# Allegro board HY_IP6518_TEST_V10A.brd
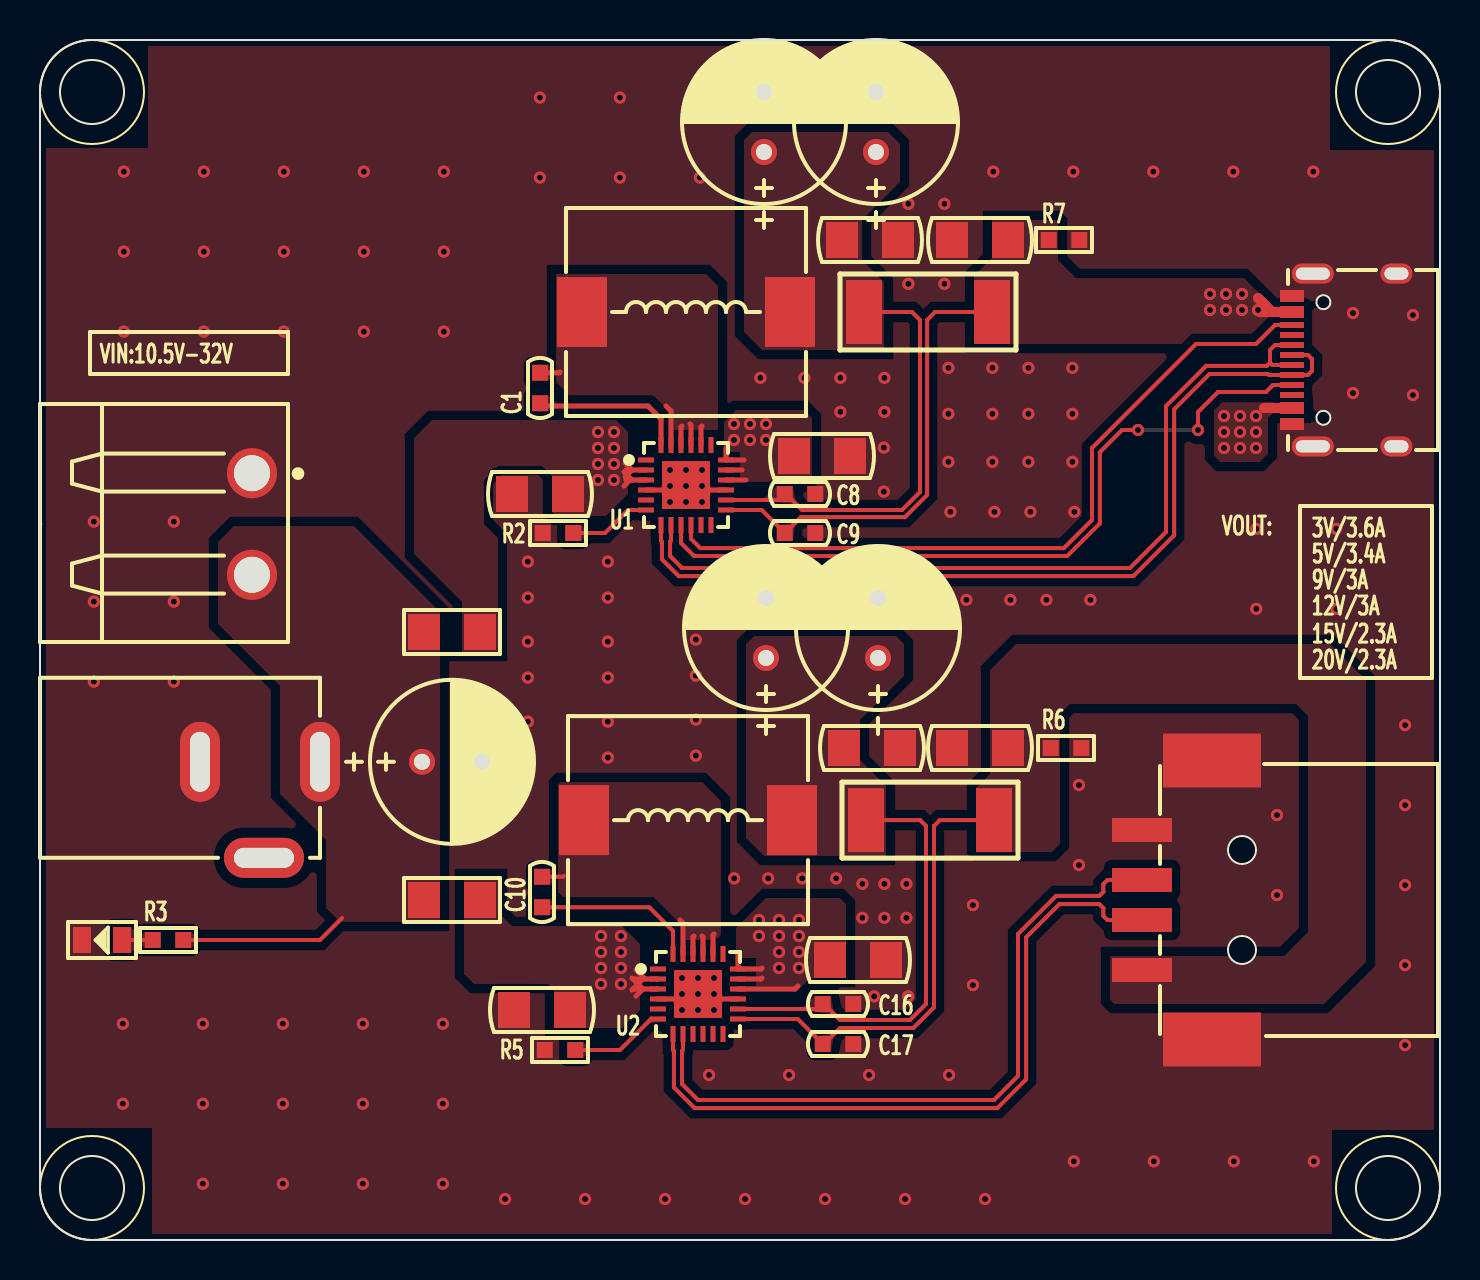
[diagram p0: board, top side]
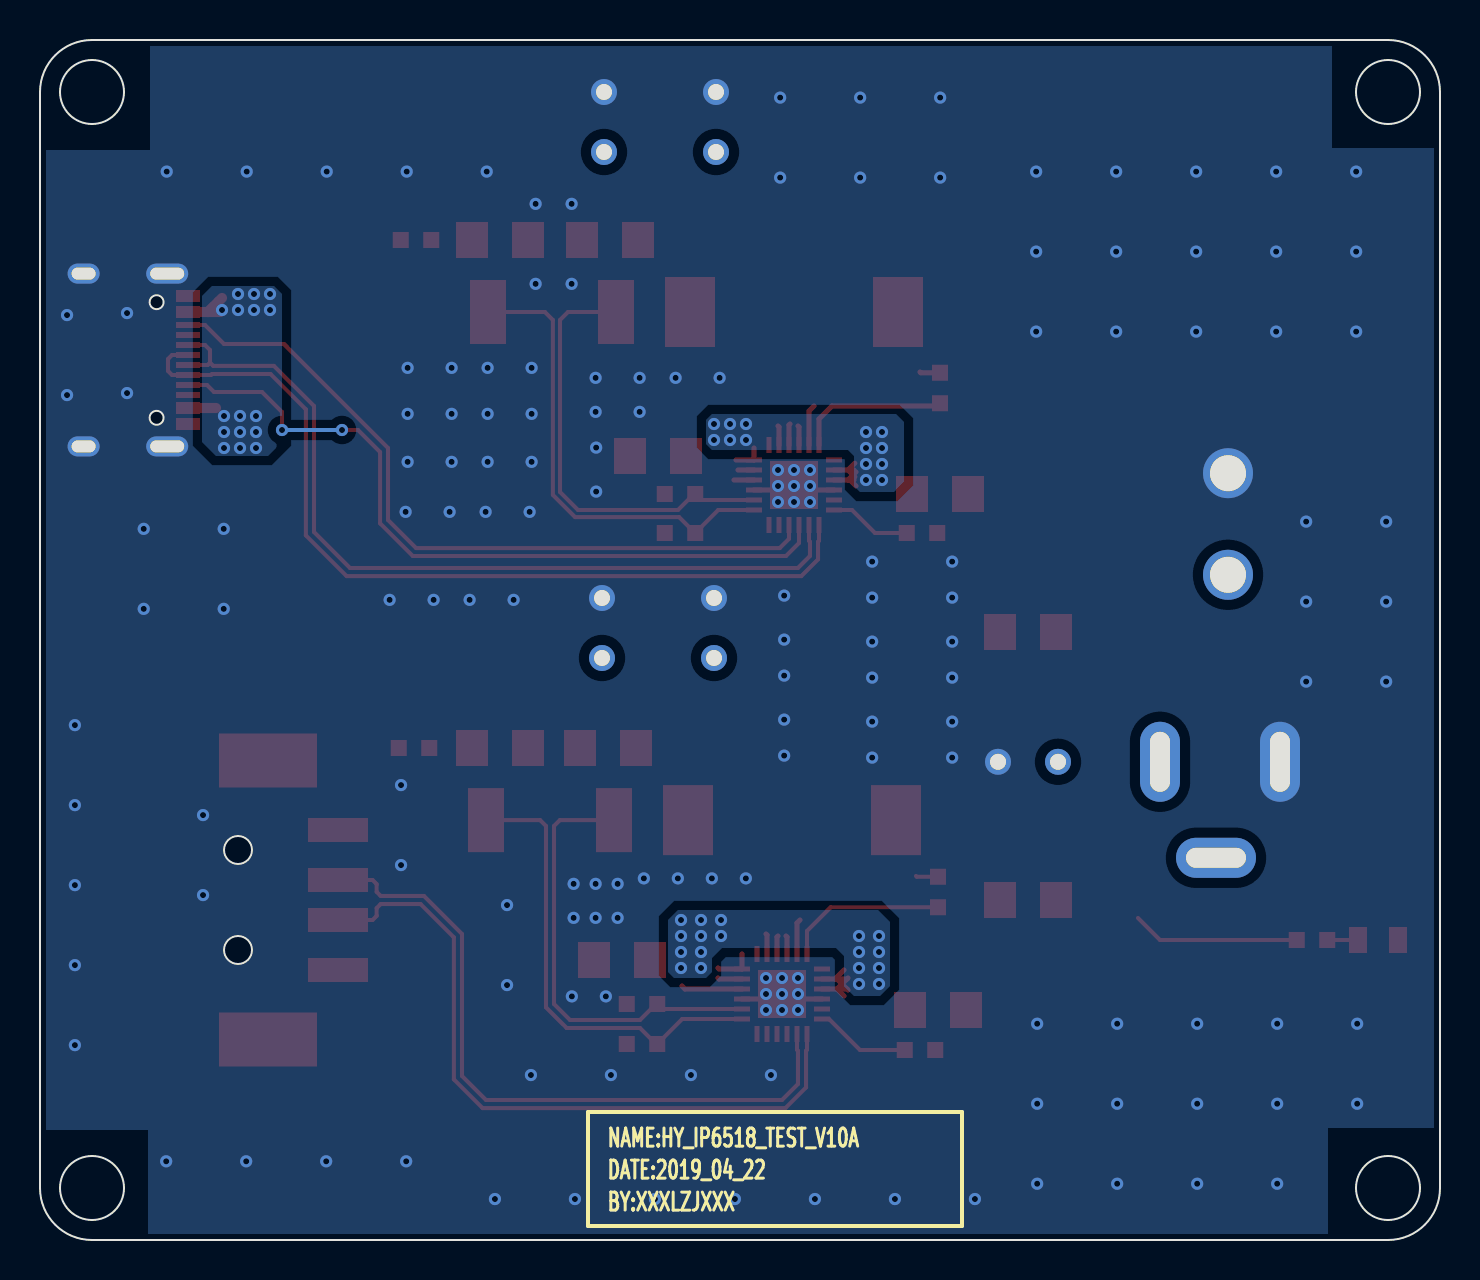
[diagram p1: board, bottom side, seen from below]

Outline 70 x 60 mm; copper layers: TOP, BOTTOM. Coordinates in mm from the lower left corner of the outline.
Outline path: circle c2.6,57.4 r1.6 ; circle c2.6,2.6 r1.6 ; circle c67.4,57.4 r1.6 ; circle c67.4,2.6 r1.6 ; 0,57.4 arc(0.76,59.24) 2.6,60 67.4,60 arc(69.24,59.24) 70,57.4 70,2.6 arc(69.24,0.76) 67.4,0 2.6,0 arc(0.76,0.76) 0,2.6 0,57.4

## Design rules (mm)
constraint set DEFAULT: min track width 0.203, pair gap 0.203
net group DP1: nets USB1_DM USB1_DP
net group DP2: nets USB2_DM USB2_DP

## Placement (name value [footprint] x y rotation side)
C1  0.1uF_50V  [C0603]  25 42.6 270 top
C2  100uF_50V  [CAP-3R0-8X12]  36.2 55.9 90 top
C3  10uF_50V  [C1206]  41.5 50 0 top
C4  10uF_50V  [C1206]  47 50 180 top
C5  10uF_50V  [C1206]  25 37.3 0 top
C6  10uF_50V  [C1206]  39.1 39.2 180 top
C7  100uF_50V  [CAP-3R0-8X12]  20.6 23.91 0 top
C8  0.1uF_50V  [C0603]  38 37.3 0 top
C9  0.1uF_50V  [C0603]  38 35.35 0 top
C10  0.1uF_50V  [C0603]  25.1 17.4 270 top
C11  100uF_50V  [CAP-3R0-8X12]  36.3 30.6 90 top
C12  10uF_50V  [C1206]  41.6 24.6 0 top
C13  10uF_50V  [C1206]  47 24.6 180 top
C14  10uF_50V  [C1206]  25.1 11.5 0 top
C15  10uF_50V  [C1206]  40.9 14 180 top
C16  0.1uF_50V  [C0603]  39.9 11.8 0 top
C17  0.1uF_50V  [C0603]  39.9 9.8 0 top
C18  100uF_50V  [CAP-3R0-8X12]  41.8 55.9 90 top
C19  100uF_50V  [CAP-3R0-8X12]  41.9 30.6 90 top
D1  LED_GREEN  [LED0805]  3.1 15 180 top
DC1  -  [DC005]  8 23.91 0 top
F1  0469005.WR  [FUSE1206]  20.6 17 0 top
F2  0469005.WR  [FUSE1206]  20.6 30.4 0 top
J1  -  [WJ2EDGRC-5R08-2P]  10.6 35.8 270 top
L1  SMMS1040-220M  [L10040]  32.3 46.4 0 top
L2  SMMS1040-220M  [L10040]  32.4 20.99 0 top
NOREF  -  []  0 0 90 top
NOREF#2  -  []  68.07 58.85 0 top
NOREF#3  -  []  0 0 0 top
R1  0R02  [R2512]  44.4 46.4 180 top
R2  47K  [R0603]  25.9 35.35 180 top
R3  10K  [R0603]  6.4 15 180 top
R4  0R02  [R2512]  44.5 20.99 180 top
R5  47K  [R0603]  26 9.5 180 top
R6  3.3K  [R0603]  51.3 24.6 0 top
R7  3.3K  [R0603]  51.2 50 0 top
U1  IP6518C  [QFN24-4X4X0R5-2R4X2R4]  32.3 37.75 270 top
U2  IP6518C  [QFN24-4X4X0R5-2R4X2R4]  32.9 12.3 270 top
USB1  -  [TYPE-C-31-M-12]  62.6 44 90 top
USB2  USB-A  [USB-A-SMD]  56 17 0 top

## Library data of the parts
C1 C8-C10 C16 C17 = CAP NP_2
C2 C7 C11 C18 C19 = CAPT_100UF_3528_6r3V_10%_LXXXX
C3-C6 C12-C15 = CAP NP_3
D1 = LED_2
DC1 = DC005
F1 F2 = FUSE
J1 = CONN RCPT 2
L1 L2 = IND_BEAD_0805_600OHM_1
R1-R7 = R_Generic
U1 U2 = IP6518C_0
USB1 = TYPE-C_16P
USB2 = USB-A

## Footprints (pads in the part's own frame, mm; a bottom-side part is the same pattern mirrored in y, then rotated)
C0603
  rect 0.8x0.8 smd: 1(-0.762,0) 2(0.762,0)
C1206
  rect 1.6x1.8 smd: 1(-1.4,0) 2(1.4,0)
CAP-3R0-8X12
  round 1.3 hole 0.8: 1(-1.5,0) 2(1.5,0)
DC005
  oval 2x4 hole 1x3: 1(6,0) 2(0,0)
  oval 4x2 hole 3x1: 3(3.2,-4.8)
FUSE1206
  rect 1.6x1.8 smd: 1(-1.4,0) 2(1.4,0)
L10040
  rect 2.5x3.5 smd: 1(-5.2,0) 2(5.2,0)
LED0805
  rect 0.9x1.3 smd: 1(-1,0) 2(1,0)
QFN24-4X4X0R5-2R4X2R4
  rect 0.25x0.8 smd: 1(-1.25,-2) 2(-0.75,-2) 3(-0.25,-2) 4(0.25,-2) 5(0.75,-2) 6(1.25,-2) 13(1.25,2) 14(0.75,2) 15(0.25,2) 16(-0.25,2) 17(-0.75,2) 18(-1.25,2)
  rect 0.8x0.25 smd: 7(2,-1.25) 8(2,-0.75) 9(2,-0.25) 10(2,0.25) 11(2,0.75) 12(2,1.25) 19(-2,1.25) 20(-2,0.75) 21(-2,0.25) 22(-2,-0.25) 23(-2,-0.75) 24(-2,-1.25)
  rect 2.4x2.4 smd: 25(0,0)
R0603
  rect 0.8x0.8 smd: 1(-0.762,0) 2(0.762,0)
R2512
  rect 1.8x3.2 smd: 1(-3.2,0) 2(3.2,0)
TYPE-C-31-M-12
  rect 0.6x1.2 smd: 1(-3.2,0) 2(-2.4,0) 11(2.4,0) 12(3.2,0)
  rect 0.3x1.2 smd: 3(-1.75,0) 4(-1.25,0) 5(-0.75,0) 6(-0.25,0) 7(0.25,0) 8(0.75,0) 9(1.25,0) 10(1.75,0)
  oval 1x2.1 hole 0.6x1.7: 13(-4.32,-1.04) 14(4.32,-1.04)
  oval 1x1.6 hole 0.6x1.2: 15(-4.32,-5.22) 16(4.32,-5.22)
USB-A-SMD
  rect 3x1.2 smd: 1(-0.9,-3.5) 2(-0.9,-1) 3(-0.9,1) 4(-0.9,3.5)
  rect 4.9x2.7 smd: 5(2.6,-6.975) 6(2.6,6.975)
WJ2EDGRC-5R08-2P
  round 2.5 hole 1.8: 1(-2.54,0) 2(2.54,0)

## Nets
GND: C2.2 C3.2 C4.2 C5.1 C6.1 C7.2 C8.2 C9.2 C11.2 C12.2 C13.2 C14.1 C15.1 C16.2 C17.2 C18.2 C19.2 D1.2(CATHODE) DC1.2 J1.1 R2.2 R5.2 R6.2 R7.2 U1.4 U1.15 U1.25 U2.4 U2.15 U2.25 USB1.1 USB1.12 USB1.13 USB1.14 USB1.15 USB1.16 USB2.4 USB2.5 USB2.6
VIN: C7.1 DC1.1 F1.1 F2.1 J1.2 R3.1
VIN1: C14.2 C15.2 F1.2 U2.2 U2.3 U2.16 U2.17 U2.18
VIN2: C5.2 C6.2 F2.2 U1.2 U1.3 U1.16 U1.17 U1.18
USB1_DM: U2.7 USB2.2
USB1_DP: U2.8 USB2.3
USB2_CC1: U1.9 USB1.4
USB2_CC2: U1.10 USB1.10
USB2_DM: U1.7 USB1.5 USB1.7
USB2_DP: U1.8 USB1.6 USB1.8
VOUT1: C13.1 C17.1 R4.1 R6.1 U2.13 USB2.1(VBUS)
VOUT2: C4.1 C9.1 R1.1 R7.1 U1.13 USB1.2 USB1.11(VBUS2)
N17443074: R5.1 U2.6
N17443738: C10.2 U2.24
N17443748: C10.1 L2.1 U2.20 U2.21 U2.22 U2.23
N17443922: C11.1 C12.1 C16.1 C19.1 L2.2(B) R4.2 U2.14(VSP)
N17447851: D1.1 R3.2
N17449043: C1.2 U1.24
N17449047: C1.1 L1.1 U1.20 U1.21 U1.22 U1.23
N17449053: C2.1 C3.1 C8.1 C18.1 L1.2(B) R1.2 U1.14(VSP)
N17449268: R2.1 U1.6

Pads without a net: DC1 3; U1 1 5 11 12 19; U2 1 5 9 10 11 12 19; USB1 3 9

## Via types
v1: diameter 0.61, hole 0.305, TOP to BOTTOM, 209 vias

## Routing (per net, layer and track width the routed paths; a pad name or vN(x,y) marks a point on that pad's centre or on a via; arc(x,y) is an arc through that point)
GND: length 5.2
  TOP w0.254: v1(33.1,37.7) 33.3,37.5 U1.15 ; v1(32.1,12.3) 31.85,12.05 U2.4 ; U1.4 31.3,37.5 v1(31.5,37.7) ; U2.15 33.95,12.05 v1(33.7,12.3)
  vias: v1(2.69,35.92) v1(2.69,31.92) v1(2.69,27.92) v1(4.14,10.81) v1(4.14,6.81) v1(4.19,53.42) v1(4.19,49.42) v1(4.19,45.42) v1(6.69,35.92) v1(6.69,31.92) v1(6.69,27.92) v1(8.14,10.81) v1(8.14,6.81) v1(8.14,2.81) v1(8.19,53.42) v1(8.19,49.42) v1(8.19,45.42) v1(12.14,10.81) v1(12.14,6.81) v1(12.14,2.81) v1(12.19,53.42) v1(12.19,49.42) v1(12.19,45.42) v1(16.14,10.81) v1(16.14,6.81) v1(16.14,2.81) v1(16.19,53.42) v1(16.19,49.42) v1(16.19,45.42) v1(20.14,10.81) v1(20.14,6.81) v1(20.14,2.81) v1(20.19,53.42) v1(20.19,49.42) v1(20.19,45.42) v1(23.25,2.05) v1(24.39,33.92) v1(24.39,32.12) v1(24.39,29.92) v1(24.39,28.12) v1(24.39,25.92) v1(24.39,24.12) v1(24.99,57.12) v1(24.99,53.12) v1(27.25,2.05) v1(28.39,33.92) v1(28.39,32.12) v1(28.39,29.92) v1(28.39,28.12) v1(28.39,25.92) v1(28.39,24.12) v1(28.99,57.12) v1(28.99,53.12) v1(31.25,2.05) v1(31.5,38.5) v1(31.5,36.9) v1(32.1,13.1) v1(32.1,11.5) v1(32.3,38.5) v1(32.3,37.7) v1(32.3,36.9) v1(32.79,32.22) v1(32.79,30.02) v1(32.79,28.22) v1(32.79,26.02) v1(32.79,24.22) v1(32.9,13.1) v1(32.9,12.3) v1(32.9,11.5) v1(32.99,57.12) v1(32.99,53.12) v1(33.1,38.5) v1(33.1,36.9) v1(33.45,8.25) v1(33.7,13.1) v1(33.7,11.5) v1(34.71,18.08) v1(35.25,2.05) v1(36.02,43.11) v1(36.41,18.08) v1(37.45,8.25) v1(38.11,18.08) v1(38.22,43.11) v1(39.25,2.05) v1(39.81,18.08) v1(40.02,43.11) v1(40.02,41.41) v1(41.12,17.81) v1(41.12,16.11) v1(41.45,8.25) v1(41.71,12.18) v1(42.22,43.11) v1(42.22,41.41) v1(42.19,39.62) v1(42.19,37.42) v1(42.22,17.81) v1(42.22,16.11) v1(43.32,17.81) v1(43.32,16.11) v1(43.25,2.05) v1(43.42,51.81) v1(43.42,47.81) v1(43.41,12.18) v1(45.22,51.81) v1(45.22,47.81) v1(45.42,43.61) v1(45.42,41.31) v1(45.42,38.91) v1(45.52,36.41) v1(45.45,8.25) v1(46.32,32.01) v1(46.65,16.75) v1(46.65,12.75) v1(47.25,2.05) v1(47.62,43.61) v1(47.62,41.31) v1(47.62,38.91) v1(47.67,53.42) v1(47.72,36.41) v1(48.52,32.01) v1(49.42,43.61) v1(49.42,41.31) v1(49.42,38.91) v1(49.52,36.41) v1(50.32,32.01) v1(51.62,43.61) v1(51.62,41.31) v1(51.62,38.91) v1(51.67,53.42) v1(51.72,36.41) v1(51.69,3.93) v1(51.95,22.75) v1(51.95,18.75) v1(52.52,32.01) v1(55.67,53.42) v1(55.69,3.93) v1(59.67,53.42) v1(59.69,3.93) v1(60.81,35.56) v1(60.81,31.56) v1(61.85,21.25) v1(61.85,17.25) v1(63.67,53.42) v1(63.69,3.93) v1(64.81,35.56) v1(64.81,31.56) v1(65.65,46.35) v1(65.65,42.35) v1(68.25,25.74) v1(68.25,21.74) v1(68.25,17.74) v1(68.25,13.74) v1(68.25,9.74) v1(68.65,46.25) v1(68.65,42.25)
VIN: length 8.4
  TOP w0.203: R3.1 14,15 15.1,16.1
VIN1: length 11.4
  TOP w0.254: U2.3 30.15,12.55 ; 30.15,12.55 29.8,12.2 ; 30.15,12.55 29.65,13.05 ; 30.15,12.55 29.65,12.55 ; 37.9,12.7 37.75,12.55 U2.16 ; 36.1,13.1 36.05,13.05 U2.17 ; 36.1,13.6 36.05,13.55 U2.18 34.9,14.3 ; 30.15,13.05 29.65,12.55 ; 30.15,13.05 30.25,13.05 ; 30.15,13.05 29.65,13.05 ; 29.65,12.55 29.6,12.5 ; 30.25,13.05 29.8,13.5 ; 30.25,13.05 U2.2 ; 29.65,13.05 29.6,13.1
  vias: v1(28.05,15.2) v1(28.05,14.4) v1(28.05,13.6) v1(28.05,12.8) v1(29.05,15.2) v1(29.05,14.4) v1(29.05,13.6) v1(29.05,12.8) v1(35.95,16) v1(35.95,15.2) v1(36.95,16) v1(36.95,15.2) v1(36.95,14.4) v1(36.95,13.6) v1(37.95,16) v1(37.95,15.2) v1(37.95,14.4) v1(37.95,13.6)
VIN2: length 7.3
  TOP w0.254: 29.6,38 29.5,38 ; 29.6,38 29.2,38.4 ; 29.6,38 U1.3 ; 29.5,38 29.2,37.7 ; 29.5,38 29.3,38 ; 35.2,39 U1.18 34.3,39.6 ; 29.6,38.5 29.26,38.84 ; 29.6,38.5 29.26,38.16 ; 29.6,38.5 29.3,38.5 ; 29.6,38.5 U1.2 ; U1.17 35.1,38.5 ; U1.16 35.3,38
  vias: v1(27.9,40.4) v1(27.9,39.6) v1(27.9,38.8) v1(27.9,38) v1(28.7,40.4) v1(28.7,39.6) v1(28.7,38.8) v1(28.7,38) v1(34.7,40.8) v1(34.7,40) v1(35.5,40.8) v1(35.5,40) v1(36.3,40.8) v1(36.3,40)
USB1_DM: length 35.5
  TOP w0.203: U2.7 31.65,9.52 31.7,9.47 31.7,7.63 32.73,6.59 47.87,6.59 49.31,8.03 49.31,15.13 50.97,16.8 52.97,16.8 53.17,16.59 53.17,16.2 53.37,16 USB2.2
USB1_DP: length 34.8
  TOP w0.203: USB2.3 53.37,18 53.17,17.8 53.17,17.41 52.97,17.2 50.8,17.2 48.9,15.3 48.9,8.2 47.7,7 32.9,7 32.1,7.8 32.1,9.47 32.15,9.52 U2.8
USB2_CC1: length 37.9
  TOP w0.203: v1(54.9,40.5) 54.1,40.5 53,39.4 53,35.84 51.36,34.2 32.7,34.2 32.05,34.85 U1.9 ; v1(57.9,40.5) 57.9,41.4 58.9,42.4 61.3,42.4 61.65,42.75 USB1.4
  BOTTOM w0.203: v1(54.9,40.5) v1(57.9,40.5)
USB2_CC2: length 37.7
  TOP w0.203: U1.10 32.55,35.06 33.01,34.6 51.2,34.6 52.6,36 52.6,39.6 57.8,44.8 60.8,44.8 61.75,45.75 USB1.10
USB2_DM: length 44.2
  TOP w0.203: USB1.7 63.4,44.25 63.6,44.05 63.6,43.45 63.4,43.25 USB1.5 61.45,43.25 61.4,43.3 58.47,43.3 56.71,41.53 56.71,35.23 54.67,33.19 31.93,33.19 31.1,34.03 31.1,34.92 31.05,34.97 U1.7
USB2_DP: length 42.7
  TOP w0.203: 61.5,43.87 61.34,43.71 58.31,43.71 56.3,41.7 56.3,35.4 54.5,33.6 32.1,33.6 31.5,34.2 31.5,34.92 31.55,34.97 U1.8 ; 61.5,43.87 61.5,44.5 61.75,44.75 USB1.8 ; 61.5,43.87 61.62,43.75 USB1.6
VOUT1: length 23.3
  TOP w0.203: R4.1 44.99,20.99 44.7,20.7 44.7,11.63 43.67,10.6 40,10.6 39.2,9.8 C17.1 37.89,11.05 U2.13
VOUT2: length 27.6
  TOP w0.203: U1.13 36.09,36.5 C9.1 37.25,35.35 38.04,36.14 43.25,36.14 44.36,37.25 44.36,46 44.76,46.4 R1.1
  TOP w0.508: 61.6,46.4 60.9,47.1 ; 61.6,46.4 61,46.4 v1(60.9,46.5) ; 61.6,46.4 USB1.11 ; USB1.2 61.2,41.6
  vias: v1(58.5,47.3) v1(58.5,46.5) v1(59.2,41.2) v1(59.2,40.4) v1(59.2,39.6) v1(59.3,47.3) v1(59.3,46.5) v1(60,41.2) v1(60,40.4) v1(60,39.6) v1(60.1,47.3) v1(60.1,46.5) v1(60.8,41.2) v1(60.8,40.4) v1(60.8,39.6)
N17443074: length 4.8
  TOP w0.203: U2.6 30.55,11.05 29,9.5 R5.1
N17443738: length 8.2
  TOP w0.203: U2.24 31.65,15.45 30.46,16.64 C10.2
N17443748: length 5.7
  TOP w0.203: C10.1 26.16,18.16 26.2,18.2
  TOP w0.254: U2.22 32.65,15.15 32.7,15.2 ; 33.7,15.3 33.65,15.25 U2.20 ; U2.23 32.15,15.85 32,16 ; U2.21 33.15,15.15 33.1,15.2
N17443922: length 22.2
  TOP w0.203: R4.2 44.01,20.99 44.3,20.7 44.3,11.8 43.5,11 40,11 39.2,11.8 C16.1 38.89,11.55 U2.14
N17447851: length 1.5
  TOP w0.203: D1.1 R3.2
N17449043: length 7.7
  TOP w0.254: C1.2 25.14,41.7 30.4,41.7 31.05,41.05 U1.24
N17449047: length 6.1
  TOP w0.254: 33.1,40.7 33.05,40.65 U1.20 ; U1.22 32.05,40.65 32.1,40.7 ; 26,43.4 25.96,43.36 C1.1 ; U1.23 31.55,41.45 31.3,41.7 ; 32.5,40.8 32.55,40.75 U1.21
N17449053: length 22.1
  TOP w0.203: U1.14 36.94,37 C8.1 37.3,37.3 38.1,36.5 43.1,36.5 44,37.4 44,46 43.6,46.4 R1.2
N17449268: length 4.1
  TOP w0.203: U1.6 29.4,36.5 28.25,35.35 R2.1

## Copper pours and planes (outline as drawn; the poured copper is in the pictures)
GND on TOP: 5.4,59.7 64.5,59.7 64.5,54.5 69.7,54.5 69.7,5.5 64.6,5.5 64.6,0.3 5.6,0.3 5.6,5.6 0.3,5.6 0.3,54.6 5.4,54.6 ; 5 cut-outs
GND on BOTTOM: 5.4,59.7 64.5,59.7 64.5,54.5 69.7,54.5 69.7,5.5 64.6,5.5 64.6,0.3 5.6,0.3 5.6,5.6 0.3,5.6 0.3,54.6 5.4,54.6
VIN on TOP: 9.7,35.7 15.7,35.7 20,31.4 20,15.9 15,15.9 14.3,16.6 14.3,20 12,22.3 12,27.7 8.9,30.8 8.9,34.9
VIN1 on TOP: 35.8,12.5 37.9,12.5 38.5,13.1 40.3,13.1 40.3,16.8 40,17.1 36.3,17.1 34.8,15.6 34.8,14.1 35.8,14.1
VIN1 on TOP: 21.2,18.1 21.2,13.3 21.7,12.8 25.4,12.8 25.7,12.5 25.7,10.6 29.1,10.6 30,11.5 30,14.8 29.1,15.7 23.6,15.7 22.9,16.4 22.9,18.1
VIN1 on BOTTOM: 38.1,16.5 28.1,16.5 27.5,15.9 27.5,12.7 28,12.2 29.3,12.2 29.8,12.7 29.8,14.2 30.2,14.6 35.9,14.6 36.4,14.1 36.4,13.4 36.7,13.1 38.3,13.1 38.6,13.4 38.6,16
VIN2 on TOP: 35,37.9 38.3,37.9 38.6,38.2 38.6,41.1 38.2,41.5 34.8,41.5 34.2,40.9 34.2,39.4 35,39.4
VIN2 on TOP: 21.1,29.4 21.1,31.9 18.7,34.3 18.7,40.1 19.6,41 28.8,41 29.4,40.4 29.4,37.3 28.3,36.2 25.8,36.2 25.6,36.4 25.6,38.2 25.1,38.7 22.9,38.7 22.2,38 22.2,35.8 22.9,35.1 22.9,29.4
VIN2 on BOTTOM: 36.4,41.3 27.2,41.3 26.8,40.9 26.8,37.9 27.3,37.4 29,37.4 29.3,37.7 29.3,39.2 29.6,39.5 36.4,39.5 36.7,39.8 36.7,41
VOUT1 on TOP: 46.9,19.4 50.6,19.4 51,19.8 51,26.3 51.5,26.8 62.8,26.8 63.4,26.2 63.4,15.4 62.2,14.2 53.5,14.2 53.5,12 53.7,11.8 64.2,11.8 66.3,13.9 66.3,28 64.5,29.8 48.8,29.8 47.5,28.5 47.5,23.3 46.8,22.6 46.8,19.5
VOUT2 on TOP: 46.7,44.8 46.7,48.2 47.6,49.1 47.6,51 50.8,51 50.9,50.9 50.9,49 51.8,48.1 60.2,48.1 61.5,46.8 61.5,46 60.6,45.1 57.4,45.1 57.1,44.8
VOUT2 on TOP: 63.2,41.9 59,41.9 58.7,41.6 58.7,39.2 59,38.9 61,38.9 61.4,39.3 61.4,41.1 61.6,41.3 63.2,41.3
VOUT2 on BOTTOM: 58.3,47.7 61.4,47.7 61.9,47.2 61.9,39.9 61.2,39.2 58.6,39.2 57.9,39.9 57.9,47.3
N17443748 on TOP: 26,22.9 33.1,22.9 34.05,21.95 34.05,15.25 33.8,15 32,15 32,15.8 30.8,17 26.3,17 25.9,17.4 25.9,22.8
N17443922 on TOP: 35.7,30.2 42.8,30.2 43.2,29.8 43.2,28.2 41,26 41,24 42.3,22.7 42.3,19.2 36.2,19.2 35.3,20.1 35.3,29.8
N17449047 on TOP: 33.9,40.5 33.9,47.7 33.3,48.3 25.8,48.3 25.8,42.9 26.5,42.2 30.7,42.2 31.4,41.5 31.4,40.5
N17449053 on TOP: 35.2,45.4 36.1,44.5 42.2,44.5 42.2,47.9 41.1,49 41.1,51 43,52.9 43,54.8 42.4,55.4 35.6,55.4 35.2,55

Small or netless copper shapes (teardrops, artwork), in the pictures only: 39 on TOP, 2 on BOTTOM

## Text on the board
Ref Des/Silkscreen Bottom: NAME:HY_IP6518_TEST_V10A | DATE:2019_04_22 | BY:XXXLZJXXX
Ref Des/Silkscreen Top: VIN:10.5V-32V | VOUT: | 3V/3.6A | 5V/3.4A | 9V/3A | 12V/3A | 15V/2.3A | 20V/2.3A
BODY_CENTER: FIGURE | FINISHED_SIZE | 0.3048 | 0.8 | 1.8 | 1.2x0.6 | 1.7x0.6 | 3.0x1.0 | DRILL CHART: TOP to BOTTOM | ALL UNITS ARE IN MILLIMETERS | ROTATION | - | 0.000 | 90.000 | PLATED | QTY | 209 | 10 | 2 | 1 | 228 | TOTAL HOLES:
